# EAGLE board mtiming (EAGLE 6.6.0)

No outline drawn. Coordinates in mm, seen from the top.
Copper layers (1*16): Top 0.035mm / dielectric 1.5mm / Bottom 0.035mm
Design rules "default": minimum track width 10mil, minimum drill 24mil, track to track 8mil, track to pad 8mil, pad to pad 8mil, via to via 8mil, smd to smd 8mil, copper to edge 25mil, drill to drill 8mil, minimum pad ring 10mil, minimum via ring 8mil, stop-mask expansion 4mil, vias tented up to drill 0mil, thermal gap 10mil
Net classes: 1 Supply: width 0.635 mm

## Placement (x,y rotation side)
U$1  [CBLOCK]  0,266.7 0 top
U$2  [CBLOCK]  0,133.35 0 top
U$3  [CBLOCK]  50.8,266.7 0 top
U$4  [CBLOCK]  101.6,266.7 0 top
U$5  [CBLOCK]  152.4,266.7 0 top
U$6  [CBLOCK]  50.8,133.35 0 top
U$7  [CBLOCK]  203.2,266.7 0 top
U$8  [CBLOCK]  101.6,133.35 0 top
U$9  [CBLOCK]  152.4,133.35 0 top
U$10  [CBLOCK]  254,266.7 0 top
U$11  [CBLOCK]  203.2,133.35 0 top
U$12  [CBLOCK]  254,133.35 0 top
U$13  [CBLOCK]  304.8,266.7 0 top
U$14  [CBLOCK]  304.8,133.35 0 top
U$15  [CBLOCK]  355.6,133.35 0 top
U$16  [CBLOCK]  355.6,266.7 0 top
U$17  [CBLOCK]  406.4,133.35 0 top
U$18  [CBLOCK]  406.4,266.7 0 top
U$19  [CBLOCK]  457.2,133.35 0 top
U$20  [CBLOCK]  0,0 0 top
U$21  [CBLOCK]  50.8,0 0 top
U$22  [CBLOCK]  457.2,266.7 0 top
U$23  [CBLOCK]  101.6,0 0 top
U$24  [CBLOCK]  152.4,0 0 top
U$25  [CBLOCK]  203.2,0 0 top
U$26  [CBLOCK]  254,0 0 top
U$27  [CBLOCK]  304.8,0 0 top
U$28  [CBLOCK]  355.6,0 0 top
U$29  [CBLOCK]  406.4,0 0 top
U$30  [CBLOCK]  457.2,0 0 top

## Library data of the parts
U$1-U$30 = dec-m